# Altium PCB PCB2.PcbDoc
Units mm, origin at the board's own origin, x right, y up, seen from the top; angles counter-clockwise.
Board outline 71.5 x 54.23 mm, 2 copper layers (Top Layer, Bottom Layer); 49 components, 51 nets, 102 pads, 0 vias.
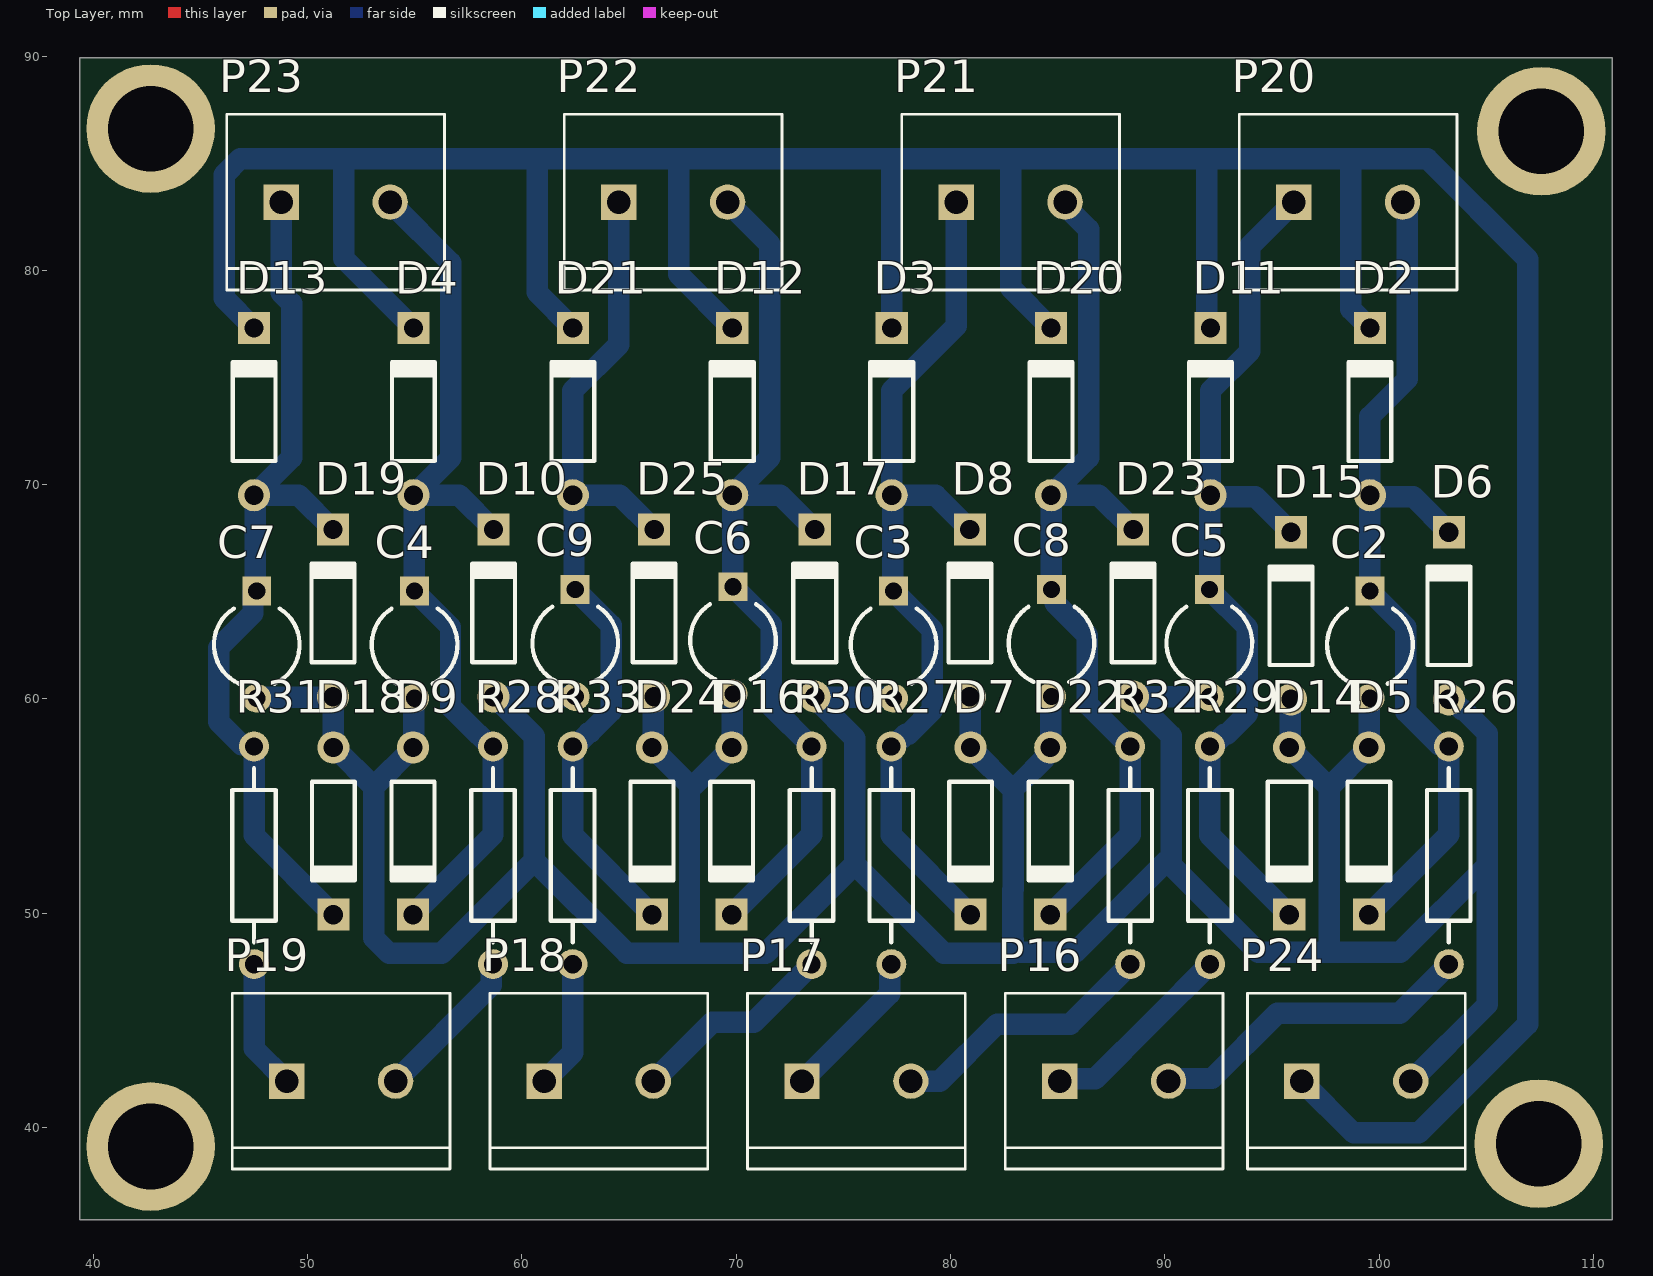
[diagram p0: Top Layer view]
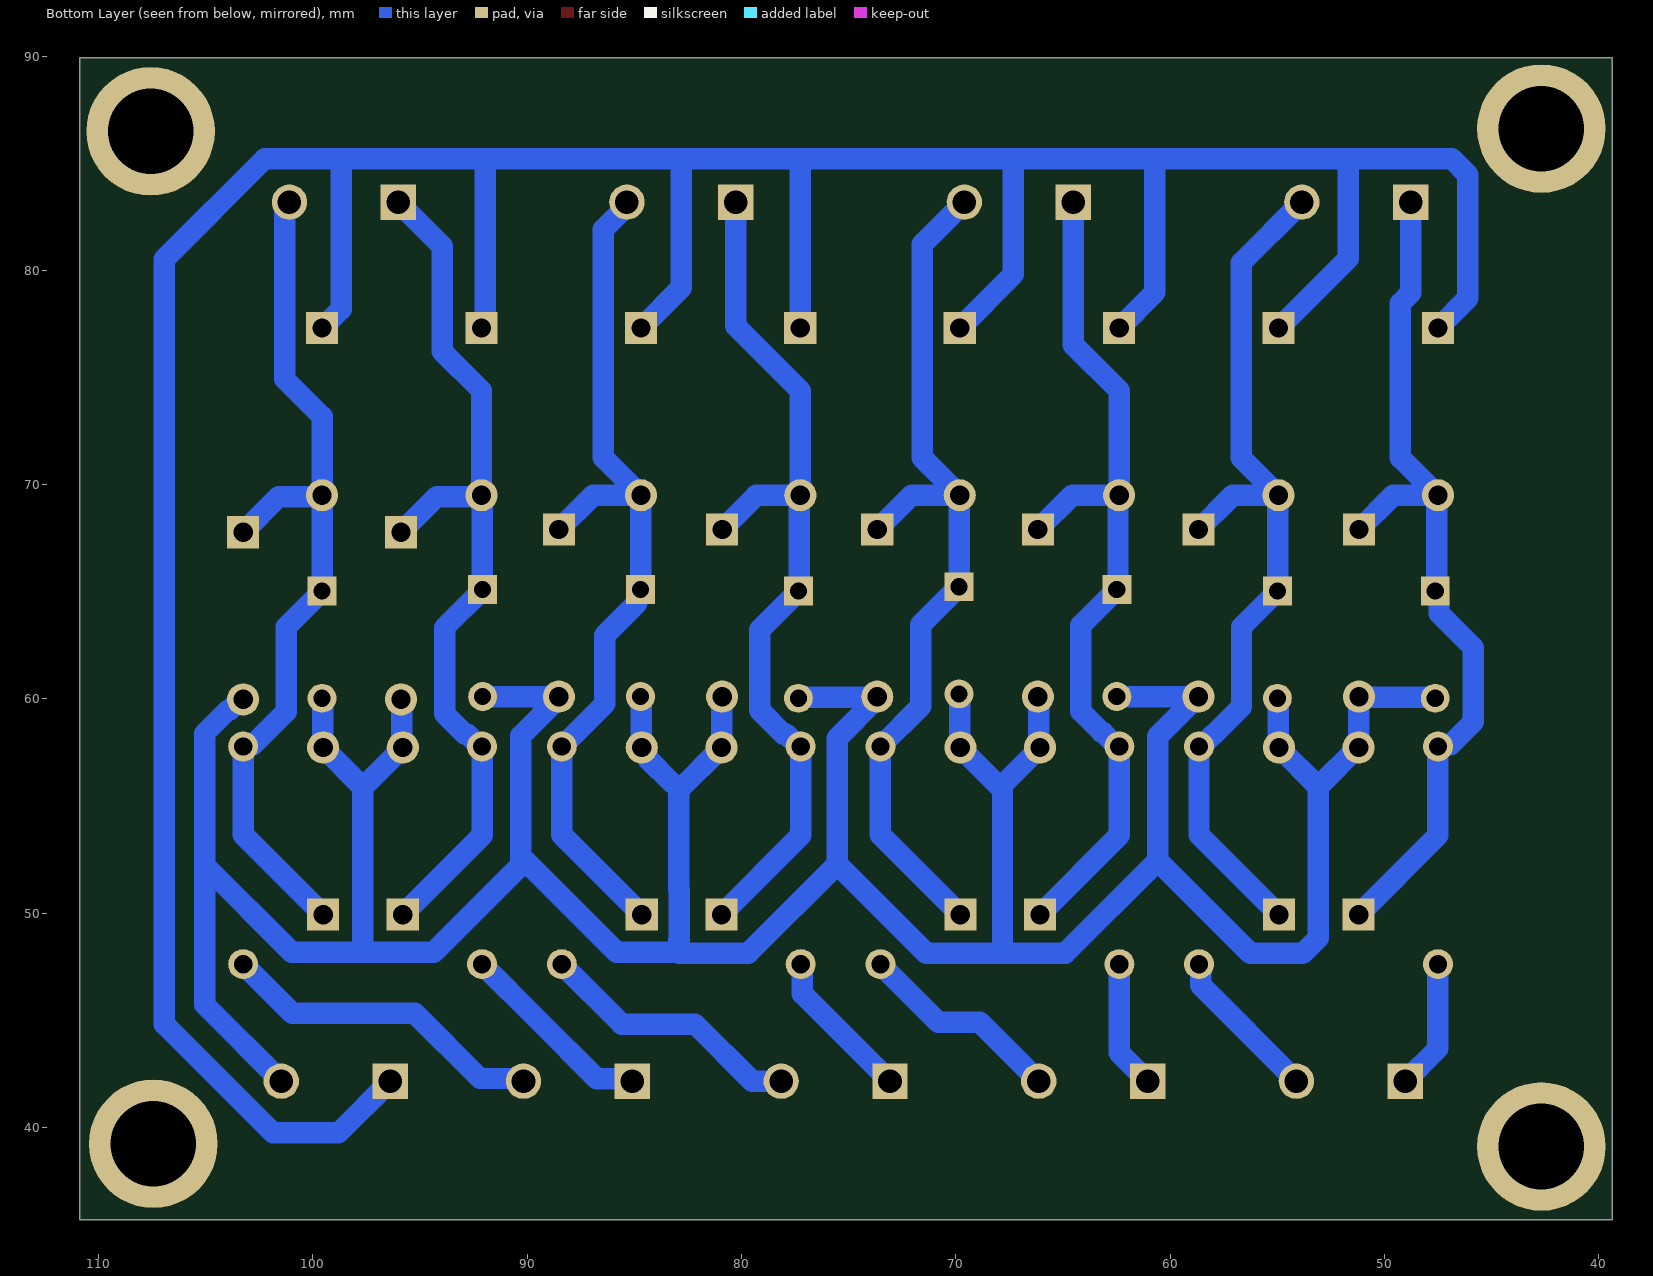
[diagram p1: Bottom Layer view, seen from below]

## Layer stack, top to bottom
Top Solder: solder mask 0.0102, Solder Resist, Dk 3.5
Top Layer: signal copper 0.0356
Dielectric 1: dielectric 0.32, FR-4, Dk 4.8
Bottom Layer: signal copper 0.0356
Bottom Solder: solder mask 0.0102, Solder Resist, Dk 3.5

## Board outline
39.37,35.687 110.871,35.687 110.871,89.916 39.37,89.916

## Design rules (kind name [scope] priority, off if disabled: settings)
Clearance [All] p1: gap=0.5 ignorepadtopadclearanceinfootprint=FALSE
PolygonConnect [All] p1: connectstyle=Relief reliefconductorwidth=0.254 reliefentries=4 polygonreliefangle="90 Angle" airgapwidth=0.254
RoutingLayers [All] p1: top layer_v5=FALSE bottom layer_v5=TRUE
RoutingVias [All] p1: holewidth=0.711 width=1.27 viastyle="Through Hole" minholewidth=0.711 minwidth=1.27 maxholewidth=0.711 maxwidth=1.27
SolderMaskExpansion [All] p1: expansion=0.102 istentingtop=FALSE
Width [All] p1: maxlimit=1 minlimit=1 preferedwidth=1 minimp=50.000000 maximp=50.000000 favimp=50.000000
29 further rules are at their usual default settings.

## Components (designator, comment, footprint, x,y, rotation, side; value= is the part's Value field where it differs from the comment)
C2 "Cap2" CAPR5-4X5 99.568,62.533 r270 top value=100pF
C3 "Cap2" CAPR5-4X5 77.343,62.533 r270 top value=100pF
C4 "Cap2" CAPR5-4X5 54.991,62.533 r270 top value=100pF
C5 "Cap2" CAPR5-4X5 92.075,62.611 r270 top value=100pF
C6 "Cap2" CAPR5-4X5 69.85,62.738 r270 top value=100pF
C7 "Cap2" CAPR5-4X5 47.625,62.533 r270 top value=100pF
C8 "Cap2" CAPR5-4X5 84.709,62.611 r270 top value=100pF
C9 "Cap2" CAPR5-4X5 62.484,62.611 r270 top value=100pF
D2 "Diode 1N4149" DO-35A 99.568,73.406 r90 top
D3 "Diode 1N4149" DO-35A 77.252,73.406 r90 top
D4 "Diode 1N4149" DO-35A 54.937,73.406 r90 top
D5 "Diode 1N4149" DO-35A 99.518,53.835 r270 top
D6 "Diode 1N4149" DO-35A 103.251,63.881 r90 top
D7 "Diode 1N4149" DO-35A 80.934,53.835 r270 top
D8 "Diode 1N4149" DO-35A 80.899,64.008 r90 top
D9 "Diode 1N4149" DO-35A 54.916,53.835 r270 top
D10 "Diode 1N4149" DO-35A 58.674,64.008 r90 top
D11 "Diode 1N4149" DO-35A 92.129,73.406 r90 top
D12 "Diode 1N4149" DO-35A 69.814,73.406 r90 top
D13 "Diode 1N4149" DO-35A 47.498,73.406 r90 top
D14 "Diode 1N4149" DO-35A 95.801,53.835 r270 top
D15 "Diode 1N4149" DO-35A 95.885,63.881 r90 top
D16 "Diode 1N4149" DO-35A 69.783,53.835 r270 top
D17 "Diode 1N4149" DO-35A 73.66,64.008 r90 top
D18 "Diode 1N4149" DO-35A 51.199,53.835 r270 top
D19 "Diode 1N4149" DO-35A 51.181,64.008 r90 top
D20 "Diode 1N4149" DO-35A 84.691,73.406 r90 top
D21 "Diode 1N4149" DO-35A 62.375,73.406 r90 top
D22 "Diode 1N4149" DO-35A 84.651,53.835 r270 top
D23 "Diode 1N4149" DO-35A 88.519,64.008 r90 top
D24 "Diode 1N4149" DO-35A 66.066,53.835 r270 top
D25 "Diode 1N4149" DO-35A 66.167,64.008 r90 top
P16 "282837-2" TE_282837-2 87.63,42.164 r0 top
P17 "282837-2" TE_282837-2 75.607,42.164 r0 top
P18 "282837-2" TE_282837-2 63.585,42.164 r0 top
P19 "282837-2" TE_282837-2 51.562,42.164 r0 top
P20 "282837-2" TE_282837-2 98.552,83.185 r0 top
P21 "282837-2" TE_282837-2 82.804,83.185 r0 top
P22 "282837-2" TE_282837-2 67.056,83.185 r0 top
P23 "282837-2" TE_282837-2 51.308,83.185 r0 top
P24 "282837-2" TE_282837-2 98.933,42.164 r0 top
R26 "Res2" AXIAL-0.4 103.251,52.705 r270 top value=1K
R27 "Res2" AXIAL-0.4 77.233,52.705 r270 top value=1K
R28 "Res2" AXIAL-0.4 58.649,52.705 r270 top value=1K
R29 "Res2" AXIAL-0.4 92.1,52.705 r270 top value=1K
R30 "Res2" AXIAL-0.4 73.516,52.705 r270 top value=1K
R31 "Res2" AXIAL-0.4 47.498,52.705 r270 top value=1K
R32 "Res2" AXIAL-0.4 88.384,52.705 r270 top value=1K
R33 "Res2" AXIAL-0.4 62.365,52.705 r270 top value=1K

## Footprints (in the part's own frame and the unit in brackets; to place one, negate y for a bottom-side part, rotate by r counter-clockwise, add the part's x,y. Pads: shape width x height; smd on the part's side, far side on the other; paste and mask are expansions set on the pad)
AXIAL-0.4 [mm] "Axial Device, Thru-Hole; 2 Leads; 0.4 in Pin Spacing"
  round 1.4 hole 0.85: 1(-5.08,0) 2(5.08,0)
  silkscreen extent -4.06,-1.02 4.06,1.02
CAPR5-4X5 [mm] "Capacitor; 2 Leads"
  rect 1.35x1.35 hole 0.8: 1(-2.5,0)
  round 1.35 hole 0.8: 2(2.5,0)
  silkscreen extent -1.69,-2 1.82,2
DO-35A [mm] "Diode, Axial; Body 4.6 x 1.9 mm (LxDia. max), Lead Dia. 0.53 mm (max)"
  round 1.5 hole 0.9: 1(-3.9,0)
  rect 1.5x1.5 hole 0.9: 2(3.9,0)
  silkscreen extent -2.3,-1 2.4,1
TE_282837-2 [mm]
  rect 1.65x1.65 / inner round 1.65 / far side rect 1.65x1.65 hole 1.1: 1(-2.54,0)
  round 1.65 hole 1.1: 2(2.54,0)
  silkscreen extent -5.08,-4.1 5.08,4.1, body extent -5.68,-4.1 5.08,4.1, height 10

## Part data
C2 C3 C4 C5 C6 C7 C8 C9: "Capacitor", PackageDescription="Capacitor; 2 Leads", PackageReference=CAPR5-4X5, Published=23-Sep-2002, Publisher="Altium Limited"
D2 D3 D4 D5 D6 D7 D8 D9 D10 D11 D12 D13 D14 D15 D16 D17 D18 D19 D20 D21 D22 D23 D24 D25: "Computer Diode", Code_JEDEC=DO-204-AH, ComponentLink1Description="Manufacturer Link", ComponentLink1URL=http://www.national.com/, DatasheetVersion=1989, LatestRevisionDate=17-Jul-2002, LatestRevisionNote="Re-released for DXP Platform.", PackageDescription="Diode, Axial; Body 4.6 x 1.9 mm (LxDia. max), Lead Dia. 0.53 mm (max)", PackageReference=DO-35A, PackageVersion=1989, Published=8-Jun-2000, Publisher="Altium Limited"
P16 P17 P18 P19 P20 P21 P22 P23 P24: "Ð Ð°Ð·ÑŠÐµÐ¼Ð½Ñ‹Ðµ ÐºÐ»ÐµÐ¼Ð¼Ð½Ñ‹Ðµ ÐºÐ¾Ð»Ð¾Ð´ÐºÐ¸ Ð Ð¾Ð·ÐµÑ‚ÐºÐ° 2 Ð¿Ð¾Ð»Ð¾Ð¶ÐµÐ½Ð¸Ñ 5,08 Ð¼Ð¼ ÐŸÑ€Ð¸Ð¿Ð¾Ð¹ Ð¿Ñ€ÑÐ¼Ð¾Ð¹ Ñ‡ÐµÑ€ÐµÐ· Ð¾Ñ‚Ð²ÐµÑ€ÑÑ‚Ð¸Ðµ 13,5 Ð / ÐºÐ¾Ð½Ñ‚Ð°ÐºÑ‚", Package=None, Availability="In Stock", Check_prices=https://www.snapeda.com/parts/282837-2/TE+Connectivity+AMP+Connectors/view-part/?ref=eda, MF="TE Connectivity", MP=282837-2, Price=None, Purchase-URL=https://pricing.snapeda.com/search/part/282837-2/?ref=eda, SnapEDA_Link=https://www.snapeda.com/parts/282837-2/TE+Connectivity+AMP+Connectors/view-part/?ref=snap
R26 R27 R28 R29 R30 R31 R32 R33: "Resistor", LatestRevisionDate=17-Jul-2002, LatestRevisionNote="Re-released for DXP Platform.", PackageDescription="Axial Device, Thru-Hole; 2 Leads; 0.4 in Pin Spacing", PackageReference=AXIAL-0.4, Published=8-Jun-2000, Publisher="Altium Limited"

## Free pads (board coordinates)
  round 6 hole 4: 11(42.672,39.116) 11(42.672,86.614) 11(107.442,39.243) 11(107.569,86.487)

## Nets (pads, with @x,y where several pads share a name; then routed paths per layer and width w, separated by ;. In a path a pad name is that pad's centre, name@x,y a point inside that pad or via, vN(x,y) a via of type N, cw(c..) or ccw(c..) an arc to the next point about the centre after c; other vN are vias at no path point)
3.3: 
+3.3: D2.2 D3.2 D4.2 D11.2 D12.2 D13.2 D20.2 D21.2 P24.1 | length 179.9
  Bottom Layer w1: D13.2 46.101,78.703 46.101,84.458 46.86,85.217 51.689,85.217 ; D4.2 51.689,80.554 51.689,85.217 ; 60.833,85.217 60.706,85.09 60.706,78.975 D21.2 ; D12.2 67.31,79.81 67.31,85.217 ; D3.2 77.252,85.181 77.216,85.217 ; D20.2 82.804,79.193 82.804,85.217 ; D11.2 91.948,77.487 91.948,85.217 ; P24.1 98.806,39.751 101.854,39.751 106.934,44.831 106.934,80.518 102.235,85.217 98.679,85.217 ; D2.2 98.679,78.195 98.679,85.217 ; 51.689,85.217 60.706,85.217 67.31,85.217 ; 67.31,85.217 77.216,85.217 ; 77.216,85.217 82.804,85.217 ; 82.804,85.217 91.948,85.217 ; 91.948,85.217 98.679,85.217
+5: 
GND: C2.2 C3.2 C4.2 C5.2 C6.2 C7.2 C8.2 C9.2 D5.1 D6.1 D7.1 D8.1 D9.1 D10.1 D14.1 D15.1 D16.1 D17.1 D18.1 D19.1 D22.1 D23.1 D24.1 D25.1 P24.2 | length 194.6
  Bottom Layer w1: C7.2 47.662,60.071 51.144,60.071 D19.1 51.19,60.099 51.19,57.744 D18.1 51.256,57.735 53.086,55.905 ; C4.2 54.953,59.995 54.953,57.773 D9.1 53.086,55.905 ; C9.2 62.482,60.11 58.675,60.11 D10.1 58.73,60.108 60.579,58.259 60.579,52.451 ; D25.1 66.117,60.058 66.117,57.785 D24.1 67.816,55.985 ; C6.2 69.817,60.205 69.817,57.768 D16.1 68.033,55.985 67.816,55.985 ; C3.2 77.305,60.071 73.697,60.071 D17.1 73.66,60.045 75.533,58.172 75.533,52.292 ; D8.1 80.916,60.091 80.916,57.752 82.916,55.753 82.916,51.114 82.901,51.099 82.901,48.771 82.916,48.756 82.916,48.133 79.692,48.133 75.533,52.292 ; 83.241,56.078 84.401,57.238 84.401,57.35 84.651,57.6 D22.1 84.68,57.764 84.68,60.082 C8.2 ; 83.27,48.185 85.815,48.185 90.084,52.454 94.352,48.185 97.669,48.185 ; 90.297,52.24 90.297,58.276 88.519,60.054 D23.1 88.52,60.11 92.073,60.11 C5.2 ; D15.1 95.843,59.939 95.843,57.777 D14.1 97.669,55.868 ; C2.2 99.543,60.008 99.543,57.76 D5.1 97.669,55.885 97.669,55.868 ; P24.2 105.053,45.744 105.053,52.253 ; D6.1@103.347,60.012 103.355,60.012 103.882,59.485 103.955,59.485 105.053,58.387 105.053,52.253 ; 53.086,55.905 53.086,48.846 53.799,48.133 56.261,48.133 60.579,52.451 ; 60.579,52.451 64.897,48.133 67.816,48.133 ; 67.816,48.133 71.374,48.133 75.533,52.292 ; 67.816,48.133 67.816,55.985 ; 97.669,48.185 97.669,55.868 ; 97.669,48.185 100.985,48.185 105.053,52.253
GND5: 
i1: P16.2 R26.2 | length 15.3
  Bottom Layer w1: P16.2 90.294,42.288 92.199,42.288 95.25,45.339 100.965,45.339 R26.2
i2: P16.1 R29.2 | length 9.3
  Bottom Layer w1: P16.1 85.201,42.275 86.75,42.275 89.494,45.019 R29.2
i3: P17.2 R32.2 | length 12.5
  Bottom Layer w1: P17.2 79.502,42.164 82.169,44.831 85.59,44.831 R32.2
i4: P17.1 R27.2 | length 7.2
  Bottom Layer w1: P17.1 77.156,46.253 77.156,47.548 R27.2
i5: P18.2 R30.2 | length 9.7
  Bottom Layer w1: P18.2 68.879,44.918 70.809,44.918 R30.2
i6: P18.1 R33.2 | length 6
  Bottom Layer w1: P18.1 62.365,43.485 R33.2
i7: P19.2 R28.2 | length 7.3
  Bottom Layer w1: P19.2 58.572,46.634 58.572,47.548 R28.2
i8: P19.1 R31.2 | length 6.1
  Bottom Layer w1: R31.2 47.498,43.688 P19.1
NetC1_1: 
NetF1_2: 
NetQ1_2: 
NetQ2_2: 
NetQ3_2: 
NetQ4_2: 
NetQ5_2: 
NetQ6_2: 
NetQ7_2: 
NetQ8_2: 
NetQ9_2: 
NetQ10_2: 
NetQ11_2: 
NetQ12_2: 
o1: C2.1 D2.1 D5.2 D6.2 P20.2 R26.1 | length 41.8
  Bottom Layer w1: D5.2 103.251,53.668 R26.1 103.174,57.862 102.793,57.862 101.243,59.412 101.243,63.358 C2.1 D2.1 ; P20.2 101.092,83.009 101.318,82.783 101.318,74.931 99.568,73.181 D2.1 ; D6.2 101.587,69.445 99.629,69.445 D2.1
o2: C5.1 D11.1 D14.2 D15.2 P20.1 R29.1 | length 42.5
  Bottom Layer w1: D14.2 92.1,53.636 R29.1 92.209,57.785 92.782,58.358 92.896,58.358 93.853,59.315 93.853,63.333 C5.1 92.102,65.138 92.102,69.479 D11.1 ; D15.2 94.221,69.445 92.19,69.445 D11.1 ; P20.1 93.956,81.129 93.956,76.218 92.129,74.392 D11.1
o3: C8.1 D20.1 D22.2 D23.2 P21.2 R32.1 | length 42
  Bottom Layer w1: D22.2 88.384,53.668 R32.1 88.367,57.785 86.384,59.768 86.384,62.968 84.884,64.468 84.884,64.936 C8.1 ; C8.1@84.7,65.12 84.7,69.497 D20.1 ; P21.2 85.344,83.009 86.441,81.912 86.441,71.256 D20.1 ; D23.2 86.921,69.506 D20.1
o4: C3.1 D3.1 D7.2 D8.2 P21.1 R27.1 | length 42.1
  Bottom Layer w1: P21.1 80.264,77.404 77.252,74.392 D3.1 ; D8.2 79.301,69.506 D3.1 ; D7.2 77.233,53.636 R27.1 77.341,57.785 77.914,58.358 78.037,58.358 79.149,59.47 79.149,63.227 C3.1 77.298,65.078 77.298,69.461 D3.1
o5: C6.1 D12.1 D16.2 D17.2 P22.2 R30.1 | length 42.4
  Bottom Layer w1: P22.2 71.564,81.217 71.564,71.256 D12.1 ; D16.2 73.516,53.668 R30.1 73.508,57.785 71.628,59.665 71.628,63.46 69.832,65.256 69.832,69.488 D12.1 ; D17.2 72.062,69.506 D12.1
o6: C9.1 D21.1 D24.2 D25.2 P22.1 R33.1 | length 41.7
  Bottom Layer w1: P22.1 64.516,76.533 62.375,74.392 D21.1 ; D24.2 62.365,53.636 R33.1 62.474,57.785 63.125,58.436 63.178,58.436 64.159,59.417 64.159,63.436 62.43,65.165 62.43,69.452 D21.1 ; D25.2 64.569,69.506 D21.1
o7: C4.1 D4.1 D9.2 D10.2 P23.2 R28.1 | length 42.7
  Bottom Layer w1: P23.2 56.687,80.346 56.687,71.256 D4.1 ; D9.2 58.649,53.668 R28.1 58.54,57.785 57.967,58.358 57.949,58.358 56.666,59.641 56.666,63.358 54.964,65.06 54.964,69.479 D4.1 ; D10.2 57.076,69.506 D4.1
o8: C7.1 D13.1 D18.2 D19.2 P23.1 R31.1 | length 41.8
  Bottom Layer w1: R31.1 47.421,57.862 46.913,57.862 45.847,58.928 45.847,62.398 47.45,64.001 47.45,64.985 47.562,65.097 47.562,69.443 D13.1 ; R31.1@47.498,57.791 47.498,53.636 D18.2 ; P23.1 48.768,78.95 49.248,78.47 49.248,71.256 D13.1 ; D19.2 49.583,69.506 D13.1
o9: 
o10: 
o11: 
o12: 
p1: 
p2: 
p3: 
p4: 
p5: 
p6: 
p7: 
p8: 
p9: 
p10: 
p11: 
p12: 

## Dimensions
110.871,90.003 to 110.976,35.727 on Top Overlay
110.871,89.916 to 39.37,89.916 on Top Overlay